# Altium PCB ABC2.PcbDoc (part 1 of 2)
Units mil, origin at the board's own origin, x right, y up, seen from the top; angles counter-clockwise.
Board outline 3540 x 3620 mil, 2 copper layers (Top Layer, Bottom Layer); 54 components, 102 nets, 450 pads, 156 vias.
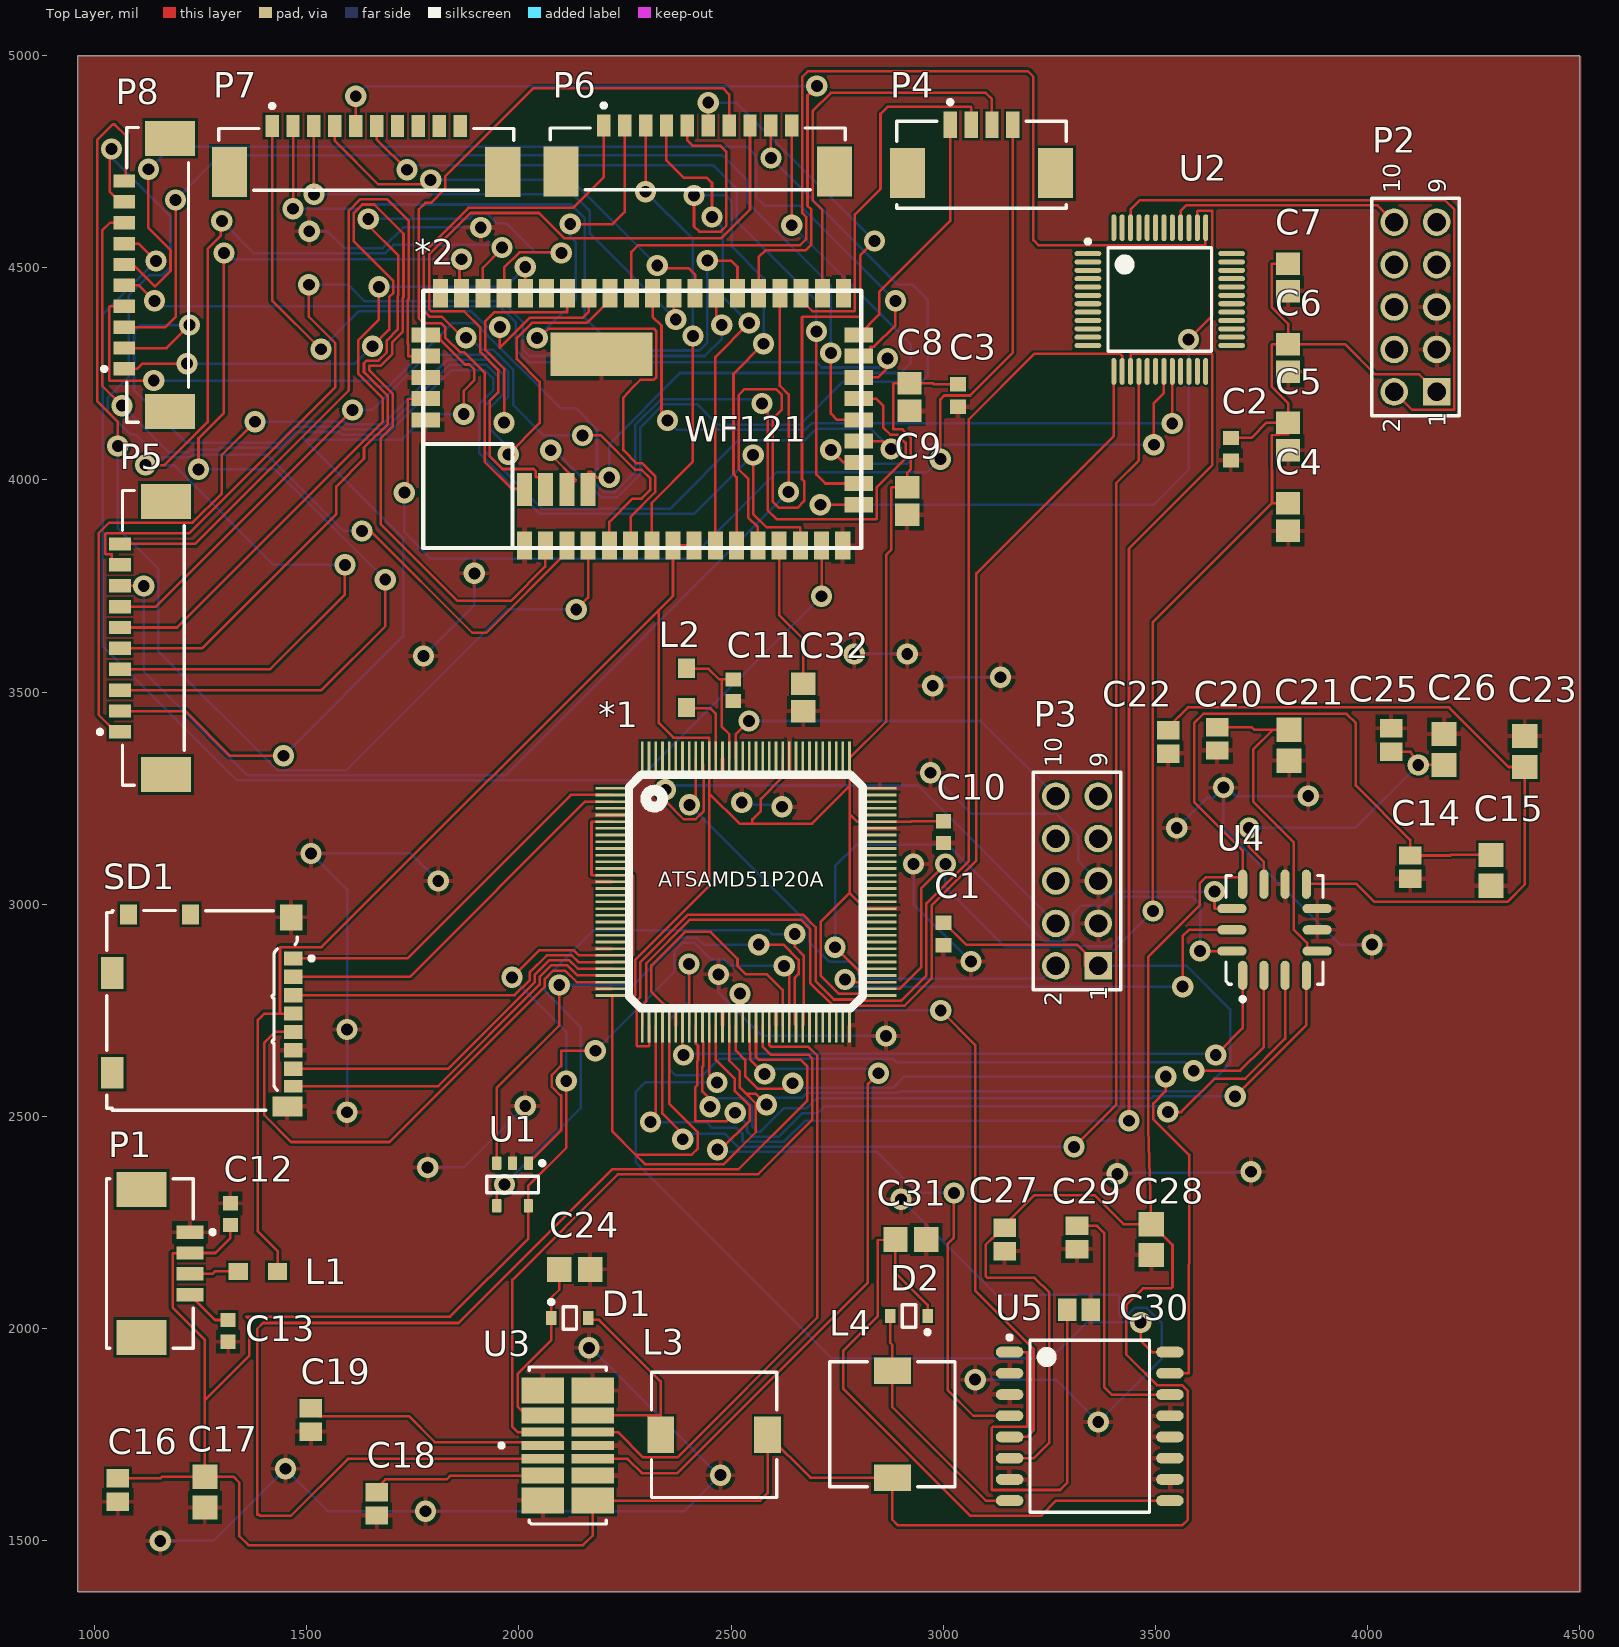
[diagram p0: Top Layer view]
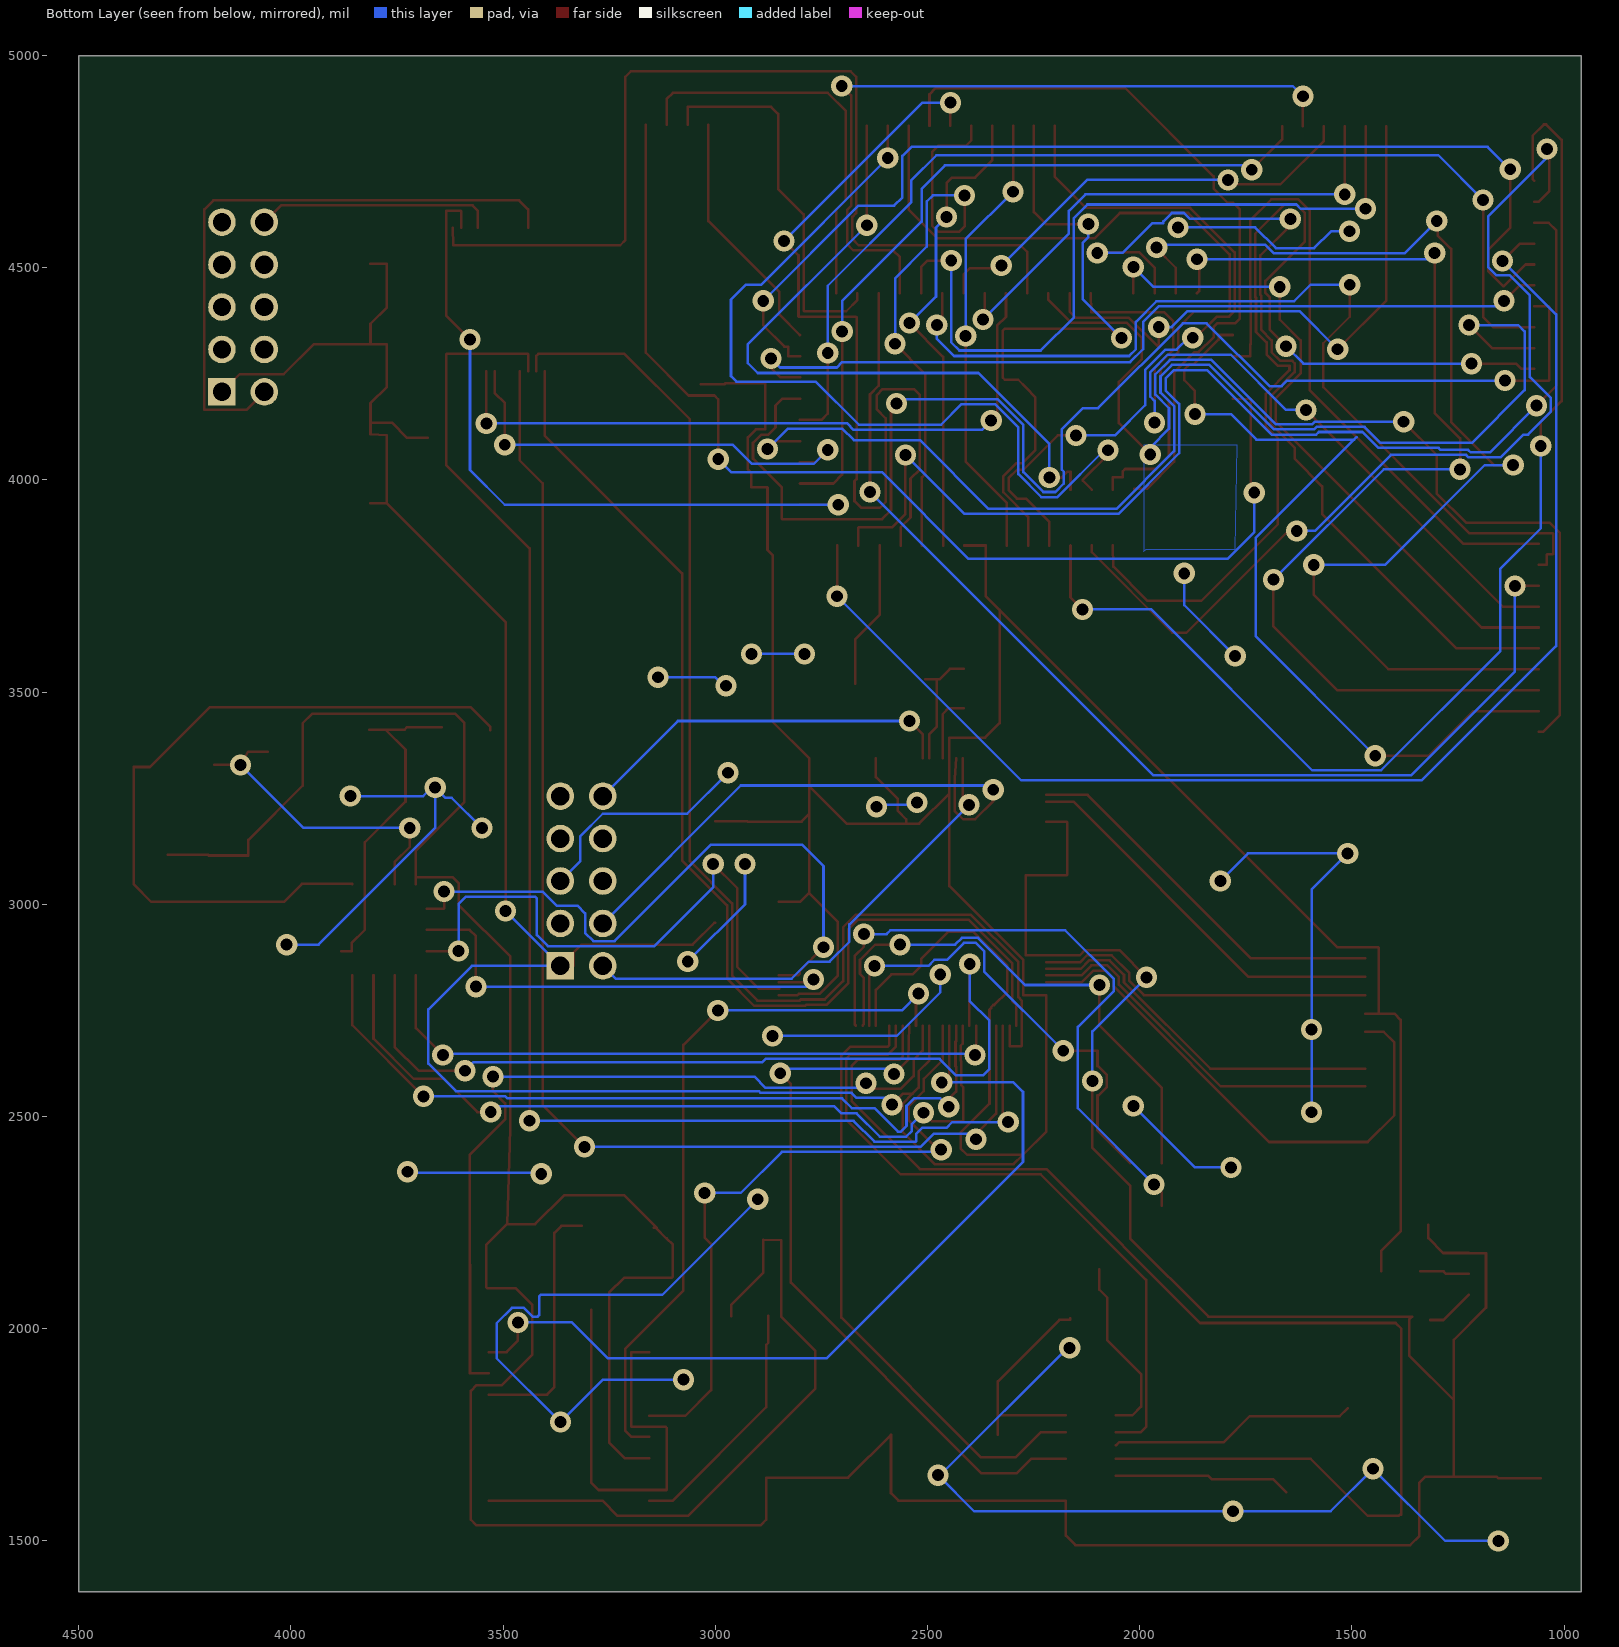
[diagram p1: Bottom Layer view, seen from below]

## Layer stack, top to bottom
Top Solder: solder mask 0.4, Solder Resist, Dk 3.5
Top Layer: signal copper 1.4
Dielectric 1: dielectric 12.6, FR-4, Dk 4.8
Bottom Layer: signal copper 1.4
Bottom Solder: solder mask 0.4, Solder Resist, Dk 3.5

## Board outline
960,1380 4500,1380 4500,5000 960,5000

## Design rules (kind name [scope] priority, off if disabled: settings)
Clearance [All] p1: gap=6 ignorepadtopadclearanceinfootprint=FALSE except(0: Arc-Hole Track-Hole SMDPad-Hole THPad-Hole Via-Hole Fill-Hole Poly-Hole Region-Hole Text-Hole)
MatchedLengths MatchedLengths_6 [InNetClass('SD_51')] p1: tolerance=1 checknetsindiffpair=FALSE checkdiffpairvsdiffpair=TRUE checkxsignals=TRUE checkothers=TRUE
MatchedLengths MatchedLengths_5 [InNetClass('WF_21')] p2: tolerance=1 checknetsindiffpair=FALSE checkdiffpairvsdiffpair=TRUE checkxsignals=TRUE checkothers=TRUE
MatchedLengths MatchedLengths_4 [InNetClass('TEMP_51')] p3: tolerance=1 checknetsindiffpair=FALSE checkdiffpairvsdiffpair=TRUE checkxsignals=TRUE checkothers=TRUE
MatchedLengths MatchedLengths_3 [InNetClass('GYS2_51')] p4: tolerance=1 checknetsindiffpair=FALSE checkdiffpairvsdiffpair=TRUE checkxsignals=TRUE checkothers=TRUE
MatchedLengths MatchedLengths_2 [InNetClass('GYS1_51')] p5: tolerance=1 checknetsindiffpair=FALSE checkdiffpairvsdiffpair=TRUE checkxsignals=TRUE checkothers=TRUE
MatchedLengths MatchedLengths_1 [InNetClass('ACC_51')] p6: tolerance=1 checknetsindiffpair=FALSE checkdiffpairvsdiffpair=TRUE checkxsignals=TRUE checkothers=TRUE
MatchedLengths [InNetClass('51_21')] p7: tolerance=1 checknetsindiffpair=FALSE checkdiffpairvsdiffpair=TRUE checkxsignals=TRUE checkothers=TRUE
PolygonConnect [All] p1: connectstyle=Relief reliefconductorwidth=10 reliefentries=4 polygonreliefangle="90 Angle" airgapwidth=10
RoutingVias [All] p1: holewidth=28 width=50 viastyle="Through Hole" minholewidth=28 minwidth=50 maxholewidth=28 maxwidth=50
SolderMaskExpansion [All] p1: expansion=4
Width [All] p1: maxlimit=6 minlimit=6 preferedwidth=6 minimp=50.000000 maximp=50.000000 favimp=50.000000
30 further rules are at their usual default settings.

## Classes and differential pairs
net class WF_21: WFCLK WFCS WFMISO WFMOSI
net class TEMP_51: TEMPCLK TEMPCS TEMPMISO
net class SD_51: SD0 SD1 SD2 SD3 SD4 SDCLK
net class ACC_51: ACCLK ACCS ACINT1 ACMISO ACMOSI ACSDRDY ACSINT2
net class GYS2_51: GYSCLK2 GYSCS2 GYSMISO2 GYSMOSI2
net class GYS1_51: GYSCLK1 GYSCS1 GYSMISO1 GYSMOSI1
net class Power: 3.3S 3.3UP 3.3V GND
net class 51_21: SAMCLK SAMCS SAMMISO SAMMOSI

## Components (designator, comment, footprint, x,y, rotation, side; value= is the part's Value field where it differs from the comment)
*1 "ATSAMD51P20A" ATSAMD51P20A 2220,3273.46 r0 top
*2 "WF121" WF121 1774.84,3839.61 r0 top
C1 "10uF" CAPC1608X90X35NL10T15 3000,2930 r90 top
C2 "10uF" CAPC1608X90X35NL10T15 3677.44,4072.44 r90 top
C3 "10uF" CAPC1608X90X35NL10T15 3034.7,4198.84 r90 top
C4 ".1uf" CAPC2013X94X50NL20T25 3812.44,3912.44 r90 top
C5 ".1uf" CAPC2013X94X50NL20T25 3812.44,4102.44 r90 top
C6 ".1uf" CAPC2013X94X50NL20T25 3812.44,4287.44 r90 top
C7 ".1uf" CAPC2013X94X50NL20T25 3812.44,4477.44 r90 top
C8 ".1uf" CAPC2013X94X50NL20T25 2920,4195 r90 top
C9 ".1uf" CAPC2013X94X50NL20T25 2915,3950 r90 top
C10 "1uF" CAPC1608X90X35LL15T15 3000,3170 r90 top
C11 "(16V 0.1uF)" CAPC1608X90X35LL15T15 2505,3504.41 r270 top
C12 "1uF" CAPC1608X90X35LL15T15 1320,2270 r90 top
C13 "1uF" CAPC1608X90X35LL15T15 1315,1995 r270 top
C14 "C0805C105K3RACTU" CAPC2013X140X50LL20T25 4100,3087.56 r90 top
C15 "CC0805KRX7R9BB104" CAPC2013X95X50ML10T25 4290,3080 r90 top
C16 "C0805C105K3RACTU" CAPC2013X140X50LL20T25 1055,1620 r270 top
C17 "CC0805KRX7R9BB104" CAPC2013X95X50ML10T25 1260,1615 r270 top
C18 "C0805C105K3RACTU" CAPC2013X140X50LL20T25 1665,1587.56 r270 top
C19 "C0805C105K3RACTU" CAPC2013X140X50LL20T25 1510,1785 r270 top
C20 "C0805C105K3RACTU" CAPC2013X140X50LL20T25 3645,3390 r270 top
C21 "CC0805KRX7R9BB104" CAPC2013X95X50ML10T25 3815,3375 r270 top
C22 "C0805C105K3RACTU" CAPC2013X140X50LL20T25 3530,3382.83 r270 top
C23 "CC0805KRX7R9BB104" CAPC2013X95X50ML10T25 4370,3360 r90 top
C24 "CC0805KRX7R9BB104" CAPC2013X95X50ML10T25 2131.42,2140 r0 top
C25 "C0805C105K3RACTU" CAPC2013X140X50LL20T25 4055,3387.44 r90 top
C26 "CC0805KRX7R9BB104" CAPC2013X95X50ML10T25 4180,3365 r90 top
C27 "C0805C105K3RACTU" CAPC2013X140X50LL20T25 3145,2210 r270 top
C28 "CC0805KRX7R9BB104" CAPC2013X95X50ML10T25 3490,2210 r270 top
C29 "C0805C105K3RACTU" CAPC2013X140X50LL20T25 3315,2215 r270 top
C30 "C0805C105K3RACTU" CAPC2013X140X50LL20T25 3320,2045 r0 top
C31 "CC0805KRX7R9BB104" CAPC2013X95X50ML10T25 2923.58,2210 r0 top
C32 ".1uf" CAPC2013X94X50NL20T25 2670,3487.52 r90 top
D1 "BAT54HT1G" ONSC-SOD-323-2-477-02_V 2120,2025 r0 top
D2 "BAT54HT1G" ONSC-SOD-323-2-477-02_V 2918.9,2030 r180 top
L1 "742792023" SMD-0805 1385,2135 r0 top
L2 "742792023" SMD-0805 2395,3510 r90 top
L3 "74477725" WE-PD-M 2460,1750 r0 top
L4 "74477725" WE-PD-M 2880,1775 r270 top
P1 "53261-0471" MOLEX-53261-0471_V 1167.91,2153.82 r270 top
P2 "61301021121" 61301021121 4112.44,4407.44 r90 top
P3 "61301021121" 61301021121 3315,3055 r90 top
P4 "53261-0471" MOLEX-53261-0471_V 3090,4780 r0 top
P5 "53398-1071" MOLX-53398-1071_V 1128.9,3627.76 r270 top
P6 "53398-1071" MOLX-53398-1071_V 2421.46,4766.1 r180 top
P7 "53398-1071" MOLX-53398-1071_V 1640,4765 r180 top
P8 "53398-1071" MOLX-53398-1071_V 1138.9,4483.03 r270 top
SD1 "104031-0811" MOLX-104031-0811_V 1255,2750 r90 top
U1 "LM95071CIMF/NOPB" DBV0005A_L 1985,2340 r270 top
U2 "ATSAMD21G18A-AU" ATML-TQFP48_M 3510,4425 r0 top
U3 "ADXRS450V" LCC127P900X400X915-14N 2115,1725 r90 top
U4 "ADXL357" LCCS127P605X560X220-14N 3780.39,2940 r90 top
U5 "ADXRS450" SOIC127P1040X373-16N 3345,1770 r0 top

## Footprints (in the part's own frame and the unit in brackets; to place one, negate y for a bottom-side part, rotate by r counter-clockwise, add the part's x,y. Pads: shape width x height; smd on the part's side, far side on the other; paste and mask are expansions set on the pad)
61301021121 [mm] "Pin Header, pitch 2.54 mm, THT, Vertical, dual row, 10p"
  rect 1.65x1.65 hole 1.1: 1(-5.08,-1.27)
  round 1.65 hole 1.1: 2(-5.08,1.27) 3(-2.54,-1.27) 4(-2.54,1.27) 5(0,-1.27) 6(0,1.27) 7(2.54,-1.27) 8(2.54,1.27) 9(5.08,-1.27) 10(5.08,1.27)
  silkscreen extent -6.5,-2.61 6.5,2.61, body extent -6.35,-2.54 6.35,2.54, height 8.59
ATML-TQFP48_M [mm] "QFP, 48-Leads, Body 7x7mm, Pitch 0.5mm, IPC Low Density"
  oval 1.6x0.3 smd: 1(-4.3,2.75) 2(-4.3,2.25) 3(-4.3,1.75) 4(-4.3,1.25) 5(-4.3,0.75) 6(-4.3,0.25) 7(-4.3,-0.25) 8(-4.3,-0.75) 9(-4.3,-1.25) 10(-4.3,-1.75) 11(-4.3,-2.25) 12(-4.3,-2.75) 25(4.3,-2.75) 26(4.3,-2.25) 27(4.3,-1.75) 28(4.3,-1.25) 29(4.3,-0.75) 30(4.3,-0.25) 31(4.3,0.25) 32(4.3,0.75) 33(4.3,1.25) 34(4.3,1.75) 35(4.3,2.25) 36(4.3,2.75)
  oval 0.3x1.6 smd: 13(-2.75,-4.3) 14(-2.25,-4.3) 15(-1.75,-4.3) 16(-1.25,-4.3) 17(-0.75,-4.3) 18(-0.25,-4.3) 19(0.25,-4.3) 20(0.75,-4.3) 21(1.25,-4.3) 22(1.75,-4.3) 23(2.25,-4.3) 24(2.75,-4.3) 37(2.75,4.3) 38(2.25,4.3) 39(1.75,4.3) 40(1.25,4.3) 41(0.75,4.3) 42(0.25,4.3) 43(-0.25,4.3) 44(-0.75,4.3) 45(-1.25,4.3) 46(-1.75,4.3) 47(-2.25,4.3) 48(-2.75,4.3)
  silkscreen extent -4.42,-3.1 3.1,3.6, body extent -4.5,-4.5 4.5,4.5, height 1.2
ATSAMD51P20A [mm]
  rect 2x0.16 smd: 1(0,0) 2(0,-0.4) 3(0,-0.8) 4(0,-1.2) 5(0,-1.6) 6(0,-2) 7(0,-2.4) 8(0,-2.8) 9(0,-3.2) 10(0,-3.6) 11(0,-4) 12(0,-4.4) 13(0,-4.8) 14(0,-5.2) 15(0,-5.6) 16(0,-6) 17(0,-6.4) 18(0,-6.8) 19(0,-7.2) 20(0,-7.6) 21(0,-8) 22(0,-8.4) 23(0,-8.8) 24(0,-9.2) 25(0,-9.6) 26(0,-10) 27(0,-10.4) 28(0,-10.8) 29(0,-11.2) 30(0,-11.6) 31(0,-12) 32(0,-12.4) 65(16,-12.4) 66(16,-12) 67(16,-11.6) 68(16,-11.2) 69(16,-10.8) 70(16,-10.4) 71(16,-10) 72(16,-9.6) 73(16,-9.2) 74(16,-8.8) 75(16,-8.4) 76(16,-8) 77(16,-7.6) 78(16,-7.2) 79(16,-6.8) 80(16,-6.4) 81(16,-6) 82(16,-5.6) 83(16,-5.2) 84(16,-4.8) 85(16,-4.4) 86(16,-4) 87(16,-3.6) 88(16,-3.2) 89(16,-2.8) 90(16,-2.4) 91(16,-2) 92(16,-1.6) 93(16,-1.2) 94(16,-0.8) 95(16,-0.4) 96(16,0)
  rect 0.16x2 smd: 33(1.8,-14.2) 34(2.2,-14.2) 35(2.6,-14.2) 36(3,-14.2) 37(3.4,-14.2) 38(3.8,-14.2) 39(4.2,-14.2) 40(4.6,-14.2) 41(5,-14.2) 42(5.4,-14.2) 43(5.8,-14.2) 44(6.2,-14.2) 45(6.6,-14.2) 46(7,-14.2) 47(7.4,-14.2) 48(7.8,-14.2) 49(8.2,-14.2) 50(8.6,-14.2) 51(9,-14.2) 52(9.4,-14.2) 53(9.8,-14.2) 54(10.2,-14.2) 55(10.6,-14.2) 56(11,-14.2) 57(11.4,-14.2) 58(11.8,-14.2) 59(12.2,-14.2) 60(12.6,-14.2) 61(13,-14.2) 62(13.4,-14.2) 63(13.8,-14.2) 64(14.2,-14.2) 97(14.2,1.8) 98(13.8,1.8) 99(13.4,1.8) 100(13,1.8) 101(12.6,1.8) 102(12.2,1.8) 103(11.8,1.8) 104(11.4,1.8) 105(11,1.8) 106(10.6,1.8) 107(10.2,1.8) 108(9.8,1.8) 109(9.4,1.8) 110(9,1.8) 111(8.6,1.8) 112(8.2,1.8) 113(7.8,1.8) 114(7.4,1.8) 115(7,1.8) 116(6.6,1.8) 117(6.2,1.8) 118(5.8,1.8) 119(5.4,1.8) 120(5,1.8) 121(4.6,1.8) 122(4.2,1.8) 123(3.8,1.8) 124(3.4,1.8) 125(3,1.8) 126(2.6,1.8) 127(2.2,1.8) 128(1.8,1.8)
  silkscreen extent 1,-13.16 15,0.81
CAPC1608X90X35LL15T15 [mm] "Chip Capacitor, 2-Leads, Body 1.60x0.81mm, IPC High Density"
  rect 0.85x0.9 smd: 1(-0.65,0) 2(0.65,0)
  body extent -0.88,-0.48 0.87,0.48, height 0.9
CAPC1608X90X35NL10T15 [mm] "Chip Capacitor, 2-Leads, Body 1.60x0.80mm, IPC Medium Density"
  rect 0.85x0.95 smd: 1(-0.675,0) 2(0.675,0)
  body extent -0.85,-0.45 0.85,0.45, height 0.9
CAPC2013X94X50NL20T25 [mm] "Chip Capacitor, 2-Leads, Body 2.01x1.25mm, IPC Medium Density"
  rect 1.35x1.45 smd: 1(-0.825,0) 2(0.825,0)
  body extent -1.1,-0.72 1.11,0.72, height 0.94
CAPC2013X95X50ML10T25 [mm] "Chip Capacitor, 2-Leads, Body 2.10x1.35mm, IPC Low Density"
  rect 1.45x1.5 smd: 1(-0.925,0) 2(0.925,0)
  body extent -1.05,-0.67 1.05,0.67, height 0.95
CAPC2013X140X50LL20T25 [mm] "Chip Capacitor, 2-Leads, Body 2.00x1.25mm, IPC High Density"
  rect 1.1x1.35 smd: 1(-0.7,0) 2(0.7,0)
  body extent -1.1,-0.72 1.1,0.72, height 1.4
DBV0005A_L [mm] "SOT23, 5-Leads, Body 3.05x1.75mm, Pitch 0.95mm, IPC High Density"
  rrect18% 0.8x0.55 smd: 1(-1.275,0.95) 2(-1.275,0) 3(-1.275,-0.95) 4(1.275,-0.95) 5(1.275,0.95)
  silkscreen extent -1.4,-1.55 0.5,1.9, body extent -1.42,-1.46 1.42,1.46, height 1.08
LCC127P900X400X915-14N [mm] "LCC, 14-Pins, Body 9.00x4.00mmx9.15mm, Pitch 1.27mm, IPC Medium Density"
  rect 1.55x2.55 smd: 1(-3.3,1.5) 7(3.3,1.5) 8(3.3,-1.5) 14(-3.3,-1.5)
  rect 0.95x2.55 smd: 2(-1.8,1.5) 6(1.8,1.5) 9(1.8,-1.5) 13(-1.8,-1.5)
  rect 0.55x2.55 smd: 3(-0.8,1.5) 4(0,1.5) 5(0.8,1.5) 10(0.8,-1.5) 11(0,-1.5) 12(-0.8,-1.5)
  silkscreen extent -4.7,-2.3 4.7,4.09, body extent -4.5,-2 4.5,2, height 9.15
LCCS127P605X560X220-14N [mm] "LCC, 14-Pins, Body 6.05x5.60mmx2.20mm, Pitch 1.27mm, IPC Medium Density"
  oval 1.75x0.55 smd: 1(-2.725,1.905) 2(-2.725,0.635) 3(-2.725,-0.635) 4(-2.725,-1.905) 8(2.725,-1.905) 9(2.725,-0.635) 10(2.725,0.635) 11(2.725,1.905)
  oval 0.55x1.75 smd: 5(-1.27,-2.55) 6(0,-2.55) 7(1.27,-2.55) 12(1.27,2.55) 13(0,2.55) 14(-1.27,2.55)
  silkscreen extent -4.27,-2.9 3.25,2.9, body extent -3.13,-2.8 3.13,2.8, height 2.2
MOLEX-53261-0471_V [mm] "SMD, 4-Leads, Body 10.15x5.2mm, Pitch 1.25mm"
  rect 0.8x1.6 smd: 1(-1.875,1.45) 2(-0.625,1.45) 3(0.625,1.45) 4(1.875,1.45)
  rect 2.1x3 smd: MP1(-4.425,-1.45) MP2(4.425,-1.45)
  silkscreen extent -5.07,-3.55 5.07,2.93, body extent -5.08,-3.55 5.07,1.65, height 3.4
MOLX-53398-1071_V [mm] "SMD, 10-Leads, Body 17.65x3.7mm, Pitch 1.25mm"
  rect 0.8x1.3 smd: 1(5.625,-1.75) 2(4.375,-1.75) 3(3.125,-1.75) 4(1.875,-1.75) 5(0.625,-1.75) 6(-0.625,-1.75) 7(-1.875,-1.75) 8(-3.125,-1.75) 9(-4.375,-1.75) 10(-5.625,-1.75)
  rect 2.1x3 smd: MP1(8.175,1) MP2(-8.175,1)
  silkscreen extent -8.82,-3.07 8.82,2.1, body extent -8.82,-2.1 8.83,2.1, height 4.77
MOLX-104031-0811_V [mm] "Micro SD, 8-Leads, Body 11.95x11.4mm, Pitch 1.1mm"
  rect 0.85x1.1 smd: 1(3.113,-5.412) 2(2.012,-5.412) 3(0.913,-5.412) 4(-0.188,-5.412) 5(-1.287,-5.412) 6(-2.387,-5.412) 7(-3.488,-5.412)
  rect 0.75x1.1 smd: 8(-4.538,-5.412)
  rect 1.2x1 smd: 9(5.748,0.738) 10(5.748,4.437)
  rect 1.55x1.35 smd: 11(5.573,-5.288)
  rect 1.17x1.8 smd: 12(-5.748,-5.063)
  rect 1.9x1.35 smd: 13(-3.723,5.412) 14(2.247,5.412)
  silkscreen extent -5.97,-6.64 5.98,5.74, body extent -5.97,-5.66 5.98,5.74, height 1.45
ONSC-SOD-323-2-477-02_V [mm] "SOD, 2-Leads, Body 1.7x1.25mm"
  rect 0.63x0.83 smd: 1(-1.115,0) 2(1.115,0)
  silkscreen extent -1.24,-0.67 0.4,1.09, body extent -0.85,-0.63 0.85,0.63, height 1.06
SMD-0805 [mm] "Chip Inductor, 2-Leads, Body 2.0x1.2mm"
  rect 1.15x1 smd: 1(-1.175,0) 2(1.175,0)
  body extent -1,-0.6 1,0.6, height 0.89
SOIC127P1040X373-16N [mm] "SOIC, 16-Leads, Body 10.30x7.80mm, Pitch 1.27mm, IPC Medium Density"
  oval 1.65x0.65 smd: 1(-4.8,4.445) 2(-4.8,3.175) 3(-4.8,1.905) 4(-4.8,0.635) 5(-4.8,-0.635) 6(-4.8,-1.905) 7(-4.8,-3.175) 8(-4.8,-4.445) 9(4.8,-4.445) 10(4.8,-3.175) 11(4.8,-1.905) 12(4.8,-0.635) 13(4.8,0.635) 14(4.8,1.905) 15(4.8,3.175) 16(4.8,4.445)
  silkscreen extent -4.92,-5.15 3.57,5.44, body extent -5.21,-5.15 5.21,5.15, height 3.73
WE-PD-M [mm] "SMD Inductor, 2-Leads, Body 7.3 x 7.3 mm"
  rect 1.6x2.2 smd: 1(-3.2,0) 2(3.2,0)
  silkscreen extent -3.75,-3.75 3.75,3.75, body extent -3.65,-3.7 3.65,3.6, height 4.49
WF121 [mm]
  rect 0.9x1.7 smd: 1(6.05,0.15) 2(7.32,0.15) 3(8.59,0.15) 4(9.86,0.15) 5(11.13,0.15) 6(12.4,0.15) 7(13.67,0.15) 8(14.94,0.15) 9(16.21,0.15) 10(17.48,0.15) 11(18.75,0.15) 12(20.02,0.15) 13(21.29,0.15) 14(22.56,0.15) 15(23.83,0.15) 16(25.1,0.15) 26(25.15,15.25) 27(23.88,15.25) 28(22.61,15.25) 29(21.34,15.25) 30(20.07,15.25) 31(18.8,15.25) 32(17.53,15.25) 33(16.26,15.25) 34(14.99,15.25) 35(13.72,15.25) 36(12.45,15.25) 37(11.18,15.25) 38(9.91,15.25) 39(8.64,15.25) 40(7.37,15.25) 41(6.1,15.25) 42(4.83,15.25) 43(3.56,15.25) 44(2.29,15.25) 45(1.02,15.25)
  rect 1.7x0.9 smd: 17(26.05,2.59) 18(26.05,3.86) 19(26.05,5.13) 20(26.05,6.4) 21(26.05,7.67) 22(26.05,8.94) 23(26.05,10.21) 24(26.05,11.48) 25(26.05,12.75) 46(0.15,12.75) 47(0.15,11.48) 48(0.15,10.21) 49(0.15,8.94) 50(0.15,7.67)
  rect 6.1x2.6 smd: 51(10.65,11.6)
  rect 0.9x2 smd: 52(6.05,3.5) 53(7.32,3.5) 54(8.59,3.5) 55(9.86,3.5)
  silkscreen extent 0,0 26.2,15.4

## Part data
*1: "https://www.microchip.com/wwwproducts/en/ATSAMD51P20A#additional-features", ComponentLink1Description=ATSAMD51P20A, ComponentLink1URL=https://www.microchip.com/wwwproducts/en/ATSAMD51P20A#additional-features
*2: "WF121 WIFI Module.", ComponentLink1Description=Datasheet, ComponentLink1URL=https://www.silabs.com/documents/public/data-sheets/WF121-DataSheet.pdf
C1 C2 C3: library part CMP-2006-02792-1, Manufacturer=Murata, Part Number=GRM188R60J106ME47D
C4 C5 C6 C7 C8 C9 C32: library part CMP-2007-04454-1, Manufacturer="AVX Interconnect / Elco", Part Number=0805YC104KAT2A
C10 C12 C13: library part CMP-2006-04551-1, Manufacturer="AVX Interconnect / Elco", Part Number=0603ZC105KAT2A
C11: library part CMP-2006-02126-1, Manufacturer="AVX Interconnect / Elco", Part Number=0603YC104MAT4A
C14 C16 C18 C19 C20 C22 C25 C27 C29 C30: library part CMP-2007-03234-1, Capacitance=1uF, Manufacturer=Kemet, Voltage Rating=25V, Part Number=C0805C105K3RACTU
C15 C17 C21 C23 C24 C26 C28 C31: library part CMP-2100-03606-1, "Chip Capacitor, 100 nF, +/- 10%, 50 V, -55 to 125 degC, 0805 (2012 Metric), RoHS, Tape and Reel", Capacitance=0.1uF, Case/Package=0805, Case Code (Metric)=2012, Dielectric=X7R, Insulation Resistance=100GR, Manufacturer=Yageo, Max Operating Temperature=125degC, Min Operating Temperature=-55degC, Package Description="2-Pin Surface Mount Device, Body 2 x 1.25 mm", Package Quantity=1, Tolerance=10%, Voltage=50V, Case Code (Imperial)=0805, Datasheet URL=http://www.yageo.com/documents/recent/UPY-GPHC_X7R_6.3V-to-50V_15.pdf, Datasheet Version="Rev. 15, 10/2016", Depth=1.25mm, Height=0.85mm, Lead Free=LeadFree, Length=2mm, Manufacturer URL=http://www.yageo.com/, Material=Ceramic, Mount=SurfaceMount, Number of Pins=2, Package Reference=0805, Packaging=TapeandReel, Radiation Hardening=No, REACH SVHC=NoSVHC, RoHSCompliant=True, Termination=SMD/SMT, Thickness=0.033inch, Voltage Rating=50V, Width=0.049inch
D1 D2: library part CMP-1055-00462-1, "Schottky Barrier Diode, 2-Pin SOD-323, Pb-Free, Tape and Reel", Manufacturer="On Semiconductor", ComponentLink1Description="Manufacturer URL", ComponentLink1URL=http://www.onsemi.com/, ComponentLink2Description=Datasheet, ComponentLink2URL=http://www.onsemi.cn/pub_link/Collateral/BAT54HT1-D.PDF, ComponentLink3Description="Package Specification", ComponentLink3URL=http://www.onsemi.com/pub_link/Collateral/477-02.PDF.1, Configuration=Single, DatasheetVersion="Rev. 6", IFSM Max (A)=0.6, Mounting Technology="Surface Mount", PackageDescription="2-Pin SOD, Body 1.7 x 1.25 mm", PackageReference=SOD-323-2-477-02, PackageVersion="Rev. H, 03/2007", Packing="Tape and Reel", PartNumber=BAT54HT1G, RoHS=TRUE, trr Max (ns)=5
L1 L2: library part CMP-0220-00030-1, "SMD EMI Suppression Ferrite Bead WE-CBF, Z = 120 Ohm", ComponentLink1Description="Manufacturer Link", ComponentLink1URL=http://www.we-online.com, ComponentLink2Description=Datasheet, ComponentLink2URL=http://www.we-online.de/katalog/media/pdf/742792023.pdf, DatasheetVersion=Dec-2005, Impedance="120 Ohm", PackageDescription="Chip Inductor, 2-Leads, Body 2.0 x 1.2 mm", PackageReference=SMD-0805, PackageVersion=2005
L3 L4: library part CMP-0227-00119-1, "SMD-Shielded Power Inductor WE-PD, L = 560 µH", Inductance="560 µH", ComponentLink1Description="Manufacturer Link", ComponentLink1URL=http://www.we-online.com, ComponentLink2Description=Datasheet, ComponentLink2URL=http://www.we-online.de/katalog/media/pdf/74477725.pdf, DatasheetVersion="ver 2, Oct-2004", PackageDescription="SMD Inductor, 2-Leads, Body 7.3 x 7.3 mm", PackageReference=WE-PD-M, PackageVersion=2006
P1 P4: library part CMP-2000-05238-1, "Male Header, Pitch 1.25 mm, 1 x 4 Position, Height 3.4 mm, -40 to 85 degC, RoHS, Tape and Reel", Current rating=1A, Manufacturer=Molex, Package Description="1.25mm Pitch PicoBlade(TM) Header, Surface Mount, Right Angle, Lead-Free, 4 Circuits", Voltage Rating=125V, =0532610471, Brand=Molex, Contact material=PhosphorBronze, Contact Plating=Tin, Datasheet URL=http://www.molex.com/pdm_docs/sd/532610471_sd.pdf, Datasheet Version="Rev. G, 01/2012", Factory Pack Quantity=1000, Housing material=Thermoplastic, Manufacturer URL=http://www.molex.com/, Mounting Angle=Right, Mounting Style=SMD/SMT, Number of Positions=4, Number of Positions / Contacts=4, Number of Rows=1, Packaging=Reel, Pitch=1.25mm, Product Category=Headers&WireHousings, Product Type=Headers, RoHS=Details, Series=53261, Termination Style=SMD, Tradename=PicoBlade, Type=Shrouded
P2 P3: library part CMP-1502-01084-1, "THT Vertical Pin Header WR-PHD, Pitch 2.54 mm, Dual Row, 10 pins", Contact Resistance=20mOhm, Manufacturer="Wurth Elektronik", Operating Temperature=-40to105degC, Rated Current=3A, Withstanding Voltage=500VAC, Working Voltage=250VAC, Datasheet URL=https://katalog.we-online.de/em/datasheet/6130xx21121.pdf, Gender=Male, Manufacturer URL=http://www.we-online.de, Mounting Technology=THT, Orientation=Vertical, Package Reference=61301021121, Packaging=Bag, Part Number=61301021121, Pin Number=10, Pitch=2.54mm, Publisher=WurthElektronik, Row Number=Dual
P5 P6 P7 P8: library part CMP-2000-05635-1, "Male Header, Pitch 1.25 mm, 1 x 10 Position, Height 4.7 mm, -40 to 85 degC, RoHS, Tape and Reel", Current rating=1A, Manufacturer=Molex, Package Description="Male Header, Pitch 1.25 mm, 1 x 10 Position, Height 4.7 mm", Voltage Rating=125V, =0533981071, Brand=Molex, Contact Gender=Pin(Male), Contact material=PhosphorBronze, Contact Plating=Tin, Datasheet URL=http://www.molex.com/pdm_docs/sd/533981071_sd.pdf, Datasheet Version="Rev. J, 09/2015", Factory Pack Quantity=1000, Housing material=Nylon, Manufacturer URL=http://www.molex.com/, Mounting Angle=Vertical, Mounting Style=SMD, Mounting Technology=SurfaceMount, Number of Positions=10Position, Number of Rows=1Row, Package Reference=53398-1071, Packaging=Reel, Pitch=1.25mm, Product=Headers, Product Category=Headers&WireHousings, RoHS=Details, Series=53398, Termination Style=SMD, Tradename=PicoBlade, Type=Shrouded
SD1: library part CMP-2000-05825-1, "Micro SD Card, RA, -25 to 85 degC, 8-Pin SMD, RoHS, Tape and Reel", Current rating=500mA, Manufacturer=Molex, Package Description="8-Pin Surface Mount Device, Body 11.95 x 11.4 mm, Pitch 1.1 mm", Voltage Rating=10VAC/DC, Brand=Molex, Card Type=microSD, Contact material=PhosphorBronze, Contact Plating=Gold, Datasheet URL=http://www.molex.com/pdm_docs/sd/1040310811_sd.pdf, Datasheet Version="Rev. E, 04/2006", Height=1.42mm, Housing material=LiquidCrystalPolymer(LCP), Insertion - Extraction Style=Push-Pull, Length=11.4mm, Manufacturer URL=http://www.molex.com/, Mating Cycles=10000, Mounting Technology=SurfaceMount, Mounting Type=Standard, Number of Contacts=8, Number of Rows=1Row, Orientation=RightAngle, Package Reference=104031-0811, Packaging=Reel, Pitch=1.1mm, Product=CardConnectors, Product Category=MemoryCardConnectors, RoHS=True, Series=104031, Termination Style=SMD
U1: library part CMP-0066-00211-3, "SPI/MICROWIRE 13-Bit Plus Sign Temperature Sensor, 5-pin SOT-23, Pb-Free", Manufacturer="Texas Instruments", PackageTopMarking=T18C*XTT, PowerWise=Y, ComponentLink1Description="Datasheet URL", ComponentLink1URL=http://www.ti.com/general/docs/lit/getliterature.tsp?genericPartNumber=LM95071&fileType=pdf, CompType="Temp Sensor IC", PackageDescription="Molded SOT-23, .115 x .063 x .040 in Body, 5 Lead, .0375 in Pitch", PackageReference=DBV0005A, PinCount=5, RoHS=Y
U2: library part CMP-2100-03585-1, "SMART ARM-Based Microcontroller, 1.62 to 3.63 V, 256 KB Flash, 32 KB SRAM, -40 to 85 degC, 48-Pin TQFP, RoHS, Tray", Case/Package=TQFP, Frequency=48MHz, Manufacturer=Atmel, Max Operating Temperature=85degC, Max Supply Voltage=3.63V, Min Operating Temperature=-40degC, Min Supply Voltage=1.62V, Package Description="48-Pin Thin Profile Plastic Quad Flat Package, Body 7 x 7 mm, Pitch 0.5 mm", Package Reference=TQFP48, Contact Plating=Tin, Datasheet URL=http://www.atmel.com/images/atmel-42181-sam-d21_datasheet.pdf, Datasheet Version="Rev. N, 10/2016", Lead Free=LeadFree, Manufacturer URL=http://www.atmel.com/, Max Frequency=48MHz, Mount=SurfaceMount, Number of Pins=48, Number of Timers/Counters=6, Packaging=Tray, REACH SVHC=NoSVHC, RoHSCompliant=true

## Via types
v1: diameter 50, hole 28, Top Layer to Bottom Layer, 156 vias

## Nets (pads, with @x,y where several pads share a name; then routed paths per layer and width w, separated by ;. In a path a pad name is that pad's centre, name@x,y a point inside that pad or via, vN(x,y) a via of type N, cw(c..) or ccw(c..) an arc to the next point about the centre after c; other vN are vias at no path point)
3.3S: *1.6 *1.14 *1.26 C12.1 C14.2 C15.2 C16.1 C17.1 C27.1 C28.1 L3.2 L4.2 P1.2 U1.5 U3.14 U4.11 U5.6 | length 10674.3
  Top Layer w6: C16.1 1155,1647.56 1158.86,1651.42 C17.1 ; C12.1 1320,2213.5 1284.93,2178.43 P1.2 1184,2177.43 1184,2049.89 1260,1973.89 1260,1832 ; v1(1984,2828) 2048,2892 2128.97,2892 2141.2,2879.76 *1.26 2268,2879.76 2269,2880.76 2269,3067.74 2268,3068.74 *1.14 2172,3068.74 2171,3069.74 2171,3193.72 2172,3194.72 *1.6 ; v1(2111.5,2584) 2111.5,2426.4 2022.4,2337.3 U1.5 2022.4,2213 1837.9,2028.5 1358,2028.5 1365,2021.5 1365,1937 1260,1832 ; C27.1 C27.1@3140.08,2237.56 ; U5.6 3213.5,1695 3250,1731.5 3250,2085 3215,2120 3103.51,2120 3100,2123.51 3100,2198.4 3114.7,2213.1 3115.61,2213.1 C27.1@3140.08,2237.56 ; U4.11 U4.11@3705.39,3064.26 ; C15.2 4195.3,3116.42 4194,3115.12 C14.2 4100,3152 3972,3280 3972,3427 3950,3449 3612.5,3449 3591,3427.5 3591,3241.39 3705.39,3127 U4.11@3705.39,3064.26 ; C17.1 1260,1832 ; C17.1 1327.08,1651.42 1341,1637.5 1341,1511.5 1362.5,1490 2151.5,1490 2174,1512.5 2174,1595.08 U3.14 2568.56,1595.08 2585.98,1612.5 L3.2 2686.97,1649.02 L4.2 2880,1550 2892.5,1537.5 3563.5,1537.5 3576,1550 3576,1853.5 3562.5,1867 3503,1867 3431,1939 3431,2056 3470,2095 3536.49,2095 3540,2098.51 3540,2197.4 3490.98,2246.42 C28.1 ; C27.1@3140.08,2237.56 3137.56,2237.56 3215,2315 3355.84,2315 3424.42,2246.42 C28.1 ; C28.1 3483,2471.5 3483,2876.91 3604.64,2998.54 3604.64,3050 3618.89,3064.26 U4.11@3705.39,3064.26
  Bottom Layer w6: v1(1984,2828) 2111.5,2700.5 v1(2111.5,2584)
3.3UP: *1.32 *1.37 *1.46 *1.54 *1.65 *1.79 *1.91 *1.97 *1.107 *1.118 *2.8 *2.9 C1.2 C2.2 C3.2 C4.2 C5.2 C6.2 C7.2 C8.2 C9.2 C10.2 L1.2 P2.1 P3.1 SD1.4 | length 12934.7
  Top Layer w6: L1.2 1431.26,2183 1385,2229.26 1385,2727.62 1400,2742.62 1438,2742.62 ; SD1.4 1438,2742.62 ; *2.9 *2.8 2363.03,3727.03 2330,3694 ; *1.46 2495.59,2632 2520.85,2606.74 2520.85,2568.15 2535.19,2553.81 ; v1(2583.45,2527.95) 2557.58,2553.81 2535.19,2553.81 ; *1.54 2621.57,2798.43 2585,2835 2534.92,2835 2515,2854.92 2515,2871.64 2451.64,2935 2391.12,2935 2312,2855.88 2312,2793.78 2343,2762.78 2344.99,2762.78 2350.26,2757.51 2350.26,2755.52 2353.86,2751.92 *1.37 2353.86,2530.5 2421.86,2462.5 2421.86,2425 2406.86,2410 2275,2410 ; *1.107 2621.57,3300 2570,3248.43 2570,3220 2550,3200 2550,3190 ; *1.65 2807,2785.28 2803.28,2789 2754.42,2789 2711,2832.42 2711,2958.64 2779.05,3026.69 ; *1.79 2800,3005.75 2779.05,3026.69 ; C1.2 3002,2956.57 3053.57,2905 3315.5,2905 3333,2887.5 3333,2855 P3.1 ; C10.2 2924.87,3195.59 2924,3194.72 *1.91 2796.83,3194.72 2779.05,3212.5 ; C3.2 2978.06,4225.42 2976,4227.48 C8.2 2883,4227.48 2882,4226.48 2882,4120 2883,4119 2904.15,4119 2923.15,4100 2923.15,4025 2915,4016.85 C9.2 2878,3982.48 2877,3981.48 2877,3835 2865,3823 2865,3430.28 *1.97 2779.05,3278.41 ; v1(3494,2984) 3494,3664.92 3774.5,3945.42 ; C2.2 3726,4099.02 3761.91,4134.92 C5.2 ; C4.2 3774.5,3945.42 ; C7.2 3775,4509.92 3774,4508.92 3774,4406.44 3812.44,4368 C6.2 ; P2.1 4120.89,4249 4017,4249 3946.08,4319.92 C6.2 ; 1438,2742.62 1437,2743.62 1437,2898 1438,2899 1535,2899 2330,3694 ; 2275,2410 2297,2388 2483,2388 2558,2463 2558,2531 2535.19,2553.81 ; 2275,2410 2220,2465 *1.32 2273,2785.28 2274,2786.28 2274,2868.79 2448.35,3043.14 2448.35,3261.65 ; 2330,3694 2330,3427.03 2364.03,3393 2447.35,3393 2448.35,3392 *1.118 2448.35,3261.65 ; 2448.35,3261.65 2520,3190 2550,3190 ; 2550,3190 2690.64,3190 2779.05,3278.41 ; 2779.05,3026.69 2779.05,3212.5 ; 2779.05,3212.5 2779.05,3278.41 ; 3774.5,3945.42 3774,4105 3812.44,4108 C5.2 ; C5.2 3812.44,4181 3774,4219.44 3774,4318.92 3775,4319.92 C6.2
  Bottom Layer w6: v1(2583.45,2527.95) 2600,2544.5 2667.96,2544.5 2679,2555.54 2893.29,2555.54 2897.43,2559.68 3611.18,2559.68 3676,2624.5 3676,2752.58 3573.58,2855 P3.1 v1(3494,2984)
3.3V: C13.1 P1.4 | length 114.6
  Top Layer w6: P1.4 1284.41,2020.59 C13.1
ACCLK: *1.39 U4.1 | length 1541
  Top Layer w6: *1.39 2385.35,2647.65 v1(2388,2645) ; v1(3642,2645) 3705.39,2708.39 U4.1
  Bottom Layer w6: v1(2388,2645) 2391,2648 3639,2648 v1(3642,2645)
ACCS: *1.42 U4.4 | length 1894.8
  Top Layer w6: *1.42 2432.6,2678.04 2434,2676.63 2434,2618.6 2432.5,2617.1 2432.5,2559 2450,2541.5 v1(2450,2523) ; v1(3687.68,2547.68) 3855.39,2715.39 U4.4
  Bottom Layer w6: v1(2450,2523) 2470,2543 2531.45,2543 2549.45,2525 2549.45,2477.73 2562.5,2464.68 2569.63,2464.68 2624.95,2520 2678.5,2520 2701.5,2543 3490.06,2543 3494.74,2547.68 v1(3687.68,2547.68)
ACINT1: *1.68 U4.12 | length 1491.7
  Top Layer w6: v1(2745,2899) 2801,2843 2801,2836 2804.48,2832.52 *1.68 ; v1(3639,3030) 3639,2991 3640,2990 U4.12
  Bottom Layer w6: v1(2745,2899) 2745,3090 2795,3140 3011.02,3140 3237.5,2913.52 3287.5,2913.52 3306.48,2932.5 3306.48,2978.48 3325,2997 3374,2997 3407,3030 v1(3639,3030)
ACMISO: *1.40 U4.2 | length 2038.7
  Top Layer w6: v1(2400.55,2859.45) 2401.1,2858.9 *1.40 ; v1(3590,2608) 3699,2608 3755.39,2664.39 U4.2
  Bottom Layer w6: v1(2400.55,2859.45) 2400.55,2772.55 2354,2726 2354,2612.5 2369.5,2597 2432.5,2597 2471.5,2636 2881.29,2636 2889.29,2628 3570,2628 v1(3590,2608)
ACMOSI: *1.41 U4.3 | length 1915.8
  Top Layer w6: *1.41 2416.85,2672 2422,2666.85 2422,2632.1 2420.5,2630.6 2420.5,2574 2416,2569.5 2416,2490 2417,2489 2489.5,2489 v1(2509.5,2509) ; v1(3529,2510.5) 3560.5,2510.5 3639,2589 3711,2589 3805.39,2683.39 U4.3
  Bottom Layer w6: v1(2509.5,2509) 2537.45,2481.05 2537.45,2465.23 2550,2452.68 2612.5,2452.68 2667.32,2507.5 2703,2507.5 2719.5,2524 3515.5,2524 v1(3529,2510.5)
ACSDRDY: *1.66 U4.14 | length 1389.3
  Top Layer w6: *1.66 2896.68,2801.02 2948.3,2852.64 2948.3,3038.3 v1(3005,3095) ; v1(3605,2890) U4.14
  Bottom Layer w6: v1(3005,3095) 3005,3040 3143.48,2901.52 3394.52,2901.52 3420.25,2927.25 3420.25,3013.25 3425,3018 3587.5,3018 3605,3000.5 v1(3605,2890)
ACSINT2: *1.67 U4.13 | length 1127.8
  Top Layer w6: v1(2768.5,2823) 2774.73,2816.77 *1.67 ; v1(3564,2806) 3564,2925 3579,2940 U4.13
  Bottom Layer w6: v1(2768.5,2823) 2785.5,2806 v1(3564,2806)
GND: *1.5 *1.15 *1.25 *1.31 *1.38 *1.45 *1.53 *1.64 *1.78 *1.90 *1.96 *1.106 *1.116 *2.1 *2.16 *2.26 *2.45 *2.48 *2.50 *2.51 C1.1 C2.1 C3.1 C4.1 C5.1 C6.1 C7.1 C8.1 C9.1 C10.1 C11.2 C12.2 C13.2 C14.1 C15.1 C16.2 C17.2 C18.2 C19.2 C20.2 C21.2 C22.2 C23.2 C24.2 C25.2 C26.2 C27.2 C28.2 C29.2 C30.2 C31.2 C32.1 P1.1 P2.3 P2.5 P3.3 P3.5 SD1.6 SD1.11 SD1.12 U1.2 U3.1 U3.7 U3.8 U3.11 U3.13 U4.6 U4.7 U4.9 U5.2 U5.3 U5.7 U5.10 U5.11 U5.12 U5.13 | length 8175.8
  Bottom Layer w6: v1(1155,1500) 1280,1500 v1(1450,1670) 1550,1570 v1(1780,1570) 2390,1570 v1(2475,1655) 2470,1655 2170,1955 v1(2165,1955) ; v1(1505.9,4585.86) 1549.14,4585.86 1589,4546 1679.08,4546 1728.08,4595 v1(1910,4595) ; v1(1595,2510) v1(1595,2705) 1595,3035 v1(1510,3120) 1745,3120 v1(1810,3055) ; v1(1775,3585) 1895,3705 v1(1895,3780) ; v1(1785,2380) 1870,2380 v1(2015,2525) ; v1(2470,2835) 2470,2792.42 2572.42,2690 v1(2865,2690) ; v1(2525,3240) 2530,3235 2615,3235 v1(2620,3230) ; v1@2805,3590 v1(2915,3590) ; v1(2900,2305) 3125,2080 3411.49,2080 3415,2076.49 3415,2032 3418.51,2028.49 3430.4,2028.49 3450.92,2049 3479.08,2049 3515,2013.08 3515,1930 v1(3365,1780) 3265,1880 v1(3075,1880) ; v1(2930,3095) 2930,3000 v1(3065,2865) ; v1(2970,3310) 3066.48,3213.52 3265.14,3213.52 3317.95,3160.71 3317.95,3102.05 P3.5 ; v1@2970,3505 3000,3535 v1(3135,3535) ; v1(3410,2365) 3412.5,2367.5 3722.5,2367.5 v1(3725,2370) ; v1(3550,3180) 3620.96,3250.96 3635.96,3250.96 v1(3660,3275) ; v1(3860,3255) 3688.08,3255 3668.08,3275 v1(3660,3275) ; v1(4010,2905) 3935,2905 3660,3180 v1(3660,3275)
  other v1: 2975,3515 2790,3590
GYSCLK1: *1.43 U5.16 | length 2047.4
  Top Layer w6: *1.43 2448.35,2598.65 v1(2466.5,2580.5) ; v1(3465,2015) 3465,1971.95 3491.95,1945 U5.16
  Bottom Layer w6: v1(2466.5,2580.5) 2297.5,2580.5 2275,2558 2275,2393 2738,1930 3253,1930 3338,2015 v1(3465,2015)
GYSCLK2: *1.51 U3.5 | length 1608
  Top Layer w6: U3.5 1997,1756.5 1984.75,1768.75 1984.75,2115.25 2233.5,2364 2563.42,2364 2691,2491.58 2691,2637 2682,2646 2593.27,2646 2574.33,2664.94 *1.51
GYSCS1: *1.44 U5.4 | length 1602.5
  Top Layer w6: *1.44 2464.09,2633.21 2508.85,2588.45 2508.85,2560.15 2544,2525 2544,2491 2475,2422 v1(2467.82,2422) ; v1(3025,2320) 3025,2215 3010,2200 3010,1855.5 3070.5,1795 U5.4
  Bottom Layer w6: v1(2467.82,2422) 2473.14,2416.68 2843.32,2416.68 2940,2320 v1(3025,2320)
GYSCS2: *1.52 U3.10 | length 1476.6
  Top Layer w6: U3.10 2233,1756.5 2292.5,1697 2374,1697 2703,2026 2703,2643.48 2681.5,2664.98 2593.56,2664.98 2590.08,2668.46 *1.52
GYSMISO1: *1.48 U5.5 | length 1709.9
  Top Layer w6: v1(2521,2789.5) 2527.09,2783.41 *1.48 ; v1(2994,2750) 3075,2669 3075,2090 3212.51,1952.49 3212.51,1760.51 3197,1745 U5.5
  Bottom Layer w6: v1(2521,2789.5) 2560.5,2750 v1(2994,2750)
GYSMISO2: *1.50 U3.3 | length 2970.3
  Top Layer w6: U3.3 1597,1693.5 1462.85,1559.35 1389.7,1559.35 1387.04,1562 1383.5,1562 1383.5,2000 1397,2013.5 1857.5,2013.5 2220,2376 2518,2376 2679,2537 2679,2619 2664,2634 2565,2634 2558.58,2640.42 *1.50
GYSMOSI1: *1.47 U5.15 | length 1941.9
  Top Layer w6: *1.47 2511.34,2655.21 2532.85,2633.69 2532.85,2595.46 2562.5,2565.81 2632.31,2565.81 v1(2645,2578.5) ; v1(3524,2594) 3524,2560 3495,2531 3495,2493.5 3579,2409.5 3578,1895 U5.15
  Bottom Layer w6: v1(2645,2578.5) 2655.96,2567.54 2881.29,2567.54 2907.75,2594 v1(3524,2594)
GYSMOSI2: *1.49 U3.12 | length 1757.6
  Top Layer w6: U3.12 2256,1693.5 2289.5,1660 2373.5,1660 2822,2108.5 2822,2577 v1(2847,2602) ; *1.49 2544.85,2634.15 v1(2579,2600)
  Bottom Layer w6: v1(2579,2600) 2591.5,2612.5 2836.5,2612.5 v1(2847,2602)
Net*1_115: *1.115 C11.1 L2.2 | length 293.5
  Top Layer w6: 2415,3555 2447,3555 2472,3530 2479,3530 ; *1.115 2495.59,3401 2478.28,3418.31 2478.28,3529.28 2479,3530 ; C11.1 2479,3530
Net*1_117: *1.117 L2.1 | length 159
  Top Layer w6: 2415,3462.48 2450,3462.48 2464.09,3448.39 *1.117
Net*2_2: *2.2 P8.1 | length 2448.1
  Top Layer w6: P8.1 1100.57,4261.57 1113,4274 v1(1218,4274) ; v1(1655,4315) 1694,4354 1694,4430.92 1704,4440.92 1704,4469.08 1611,4562.08 1611,4629.08 1630.92,4649 1659.08,4649 1728,4580.08 1728,4430.98 1726,4428.98 1726,4349.03 1701,4324.03 1701,4295.95 1674.05,4269 1647,4269 1647,4258.86 1703,4202.86 1703,4126.99 1674.73,4098.72 1674.73,3895.27 1855,3715 1981.3,3715 2061.85,3795.55 *2.2
  Bottom Layer w6: v1(1218,4274) 1614,4274 v1(1655,4315)
Net*2_3: *2.3 P8.9 | length 2300
  Top Layer w6: v1(1040,4780) 1035.41,4775.41 1035.41,4680.02 1060.16,4655.28 P8.9 ; v1(1630,3880) 1650,3880 1890,3640 1923.27,3640 2113.03,3829.76 *2.3
  Bottom Layer w6: v1(1040,4780) 1040,4760 1179,4621 1179,4501.77 1159.08,4481.85 1127.97,4481.85 1080.53,4434.41 1080.53,4242.53 1031,4193 1031,4160.92 1084.96,4106.96 1096.12,4106.96 1150.08,4053 1224.92,4053 1230.92,4059 1407.97,4059 1586.97,3880 v1(1630,3880)
Net*2_4: *2.4 P8.10 | length 2886.5
  Top Layer w6: v1(1055,4080) 1055,4136.92 1006,4185.92 1006,4801 1042.51,4837.51 1047.49,4837.51 1074,4811 1074,4708.49 P8.10 ; v1(2135,3695) 2163.03,3723.03 *2.4
  Bottom Layer w6: v1(1055,4080) 1055,3885.96 1150,3790.96 1150,3596.92 1430.92,3316 1593.51,3316 1972.51,3695 v1(2135,3695)
Net*2_5: *2.5 P6.1 | length 1711.8
  Top Layer w6: v1(1875,4335) 1868.2,4335 1818.2,4385 1789.12,4385 1776.28,4397.84 1776.28,4536.34 1880.95,4641 2127,4641 2200,4714 P6.1 ; v1(2150,4105) 2193.08,4105 2274.03,4024.05 2289.03,4024.05 2309,4004.08 2309,3975.92 2289.08,3956 2268.1,3956 2213.03,3900.94 *2.5
  Bottom Layer w6: v1(1875,4335) 1885,4335 1913,4307 1938.97,4307 1987,4258.97 1987,4176.03 2058.03,4105 v1(2150,4105)
Net*2_6: *2.6 P6.2 | length 1565.6
  Top Layer w6: v1(2043,4334.5) 2048.35,4334.5 2070.33,4356.48 2317.94,4356.48 2323.21,4351.21 2323.21,4241.39 2317.94,4236.12 2286.12,4236.12 2268,4218 2246,4194 2246,4070.42 2277.42,4039 2291.05,4039 2321,4009.05 2321,3970.95 2263.03,3912.98 *2.6 ; v1(2121,4603) 2221,4603 2249.21,4631.21 P6.2
  Bottom Layer w6: v1(2043,4334.5) 2134,4425.5 2134,4559.08 2121,4572.08 v1(2121,4603)
Net*2_7: *2.7 P6.3 | length 1075.9
  Top Layer w6: v1(2298.43,4678.93) P6.3 ; *2.7 2313.03,3946.01 2410,4042.98 v1(2410,4339)
  Bottom Layer w6: v1(2298.43,4678.93) 2410,4567.35 v1(2410,4339)
Net*2_10: *2.10 P6.4 | length 1135
  Top Layer w6: P6.4 2347.64,4752.86 2388,4712.5 2442.5,4712.5 2455,4700 v1(2455,4619.5) ; *2.10 2463.03,4290.03 v1(2542.5,4369.5)
  Bottom Layer w6: v1(2455,4619.5) 2480,4594.5 2480,4432 v1(2542.5,4369.5)
Net*2_11: *2.11 P6.5 | length 1442.1
  Top Layer w6: P6.5 2396.85,4800 2409.85,4787 2475,4787 2489,4773 2489,4599 2475,4585 2425,4585 2412.5,4597.5 v1(2412.5,4670.5) ; *2.11 2513.03,4006.24 2505.6,4013.67 2505.6,4250.1 v1(2576.5,4321)
  Bottom Layer w6: v1(2412.5,4670.5) 2487.5,4670.5 2501.78,4656.22 2501.78,4549.82 2576.5,4475.1 v1(2576.5,4321)
Net*2_12: *2.12 P6.6 | length 2178.4
  Top Layer w6: P6.6 v1(2446.06,4889) ; *2.12 2563.03,3888.97 2540,3912 2540,4003 2518,4025 2518,4200 2532,4214 2605.5,4214 2619.5,4200 2619.5,4166.19 2598.31,4145 2598.31,3948.19 2612.5,3934 2656,3934 2672,3950 2672,3997 2667,4002 2667,4383 2669,4385 2803,4385 2804,4386 2804,4529 v1(2838,4563)
  Bottom Layer w6: v1(2446.06,4889) 2512,4889 v1(2838,4563)
Net*2_13: *2.13 C32.2 | length 349.1
  Top Layer w6: *2.13 2613.03,3682 2670,3625.03 C32.2
Net*2_14: *2.14 P8.8 | length 2761.2
  Top Layer w6: v1(1065,4175) 1018,4222 1018,4587.5 1036.56,4606.06 P8.8 ; v1(2552,4059) 2552,3920 2584,3888 2662.03,3888 2663.03,3887 *2.14
  Bottom Layer w6: v1(1065,4175) 1175,4065 1219.95,4065 1225.95,4071 1291,4071 1295.5,4075.5 1437.47,4075.5 1474.97,4113 1577.98,4113 1583.98,4107 1688.92,4107 1840.92,4259 1919.08,4259 1939,4239.08 1939,4210.92 1907,4178.92 1907,4062.95 2049.95,3920 2413,3920 v1(2552,4059)
Net*2_15: *2.15 P8.7 | length 3175.9
  Top Layer w6: P8.7 1104,4556.85 v1(1145,4515.85) ; v1(2713.03,3726) *2.15
  Bottom Layer w6: v1(1145,4515.85) 1019,4389.85 1019,3608.5 1335.5,3292 2279.03,3292 v1(2713.03,3726)
Net*2_18: *2.18 P7.6 | length 1796.3
  Top Layer w6: P7.6 1664.61,4802.39 v1(1736,4731) ; v1(2701,4349.5) 2701,4012.5 2721.92,3991.58 *2.18
  Bottom Layer w6: v1(1736,4731) 1746,4741 2458.78,4741 2513.78,4686 2513.78,4608.44 2701,4421.22 v1(2701,4349.5)
Net*2_20: *2.20 P8.2 | length 2839.9
  Top Layer w6: P8.2 1169.79,4310.79 v1(1224,4365) ; *2.20 2858.42,4091.58 v1(2877,4073)
  Bottom Layer w6: v1(1224,4365) 1108,4365 1093,4350 1093,4211.5 1217,4087.5 1432.5,4087.5 1470,4125 1582.95,4125 1588.95,4119 1683.95,4119 1835.95,4271 1924.05,4271 1951,4244.05 1951,4205.95 1919,4173.95 1919,4067.92 2054.92,3932 2355.93,3932 2517.6,4093.67 2673.58,4093.67 2701,4121.09 2828.91,4121.09 v1(2877,4073)
Net*2_21: *2.21 P8.3 | length 2524.6
  Top Layer w6: P8.3 1167,4360 1191,4384 v1(1191,4659.88) ; v1(2735,4299) 2735,4156.58 2750,4141.58 *2.21
  Bottom Layer w6: v1(1191,4659.88) 1296.12,4765 2479.28,4765 2537.78,4706.5 2537.78,4654.78 2735,4457.56 v1(2735,4299)
Net*2_22: *2.22 P8.4 | length 3133.9
  Top Layer w6: P8.4 1036,4409.21 1035,4408.21 1035,4235 1036,4234 v1(1139.5,4234) ; v1(2573,4180) 2586,4167 2586,3928.54 2607.04,3907.5 2842,3907.5 2843,3908.5 2843,3981.85 2911.15,4050 2911.15,4087.5 2891.65,4107 2875,4107 2858.15,4123.85 2858.15,4175 2841.58,4191.58 *2.22
  Bottom Layer w6: v1(1139.5,4234) 1652.92,4234 1665.92,4221 1694.08,4221 1842.08,4369 1897.92,4369 2097.92,4169 2134.08,4169 2184,4119.08 2184,4024.8 2178.92,4019.72 2178.92,3991.55 2198.84,3971.63 2227,3971.63 2274,4018.63 2274,4129.05 2335.45,4190.5 2562.5,4190.5 v1(2573,4180)
Net*2_23: *2.23 P8.5 | length 2024.2
  Top Layer w6: P8.5 1105,4458.43 v1(1141.43,4422) ; *2.23 2846,4241.58 2868.42,4264 v1(2868.42,4286)
  Bottom Layer w6: v1(1141.43,4422) 1154.43,4409 1955.39,4409 1992.03,4372.37 1992.03,4308 2022.53,4277.5 2701,4277.5 2713.5,4265 2847.42,4265 v1(2868.42,4286)
Net*2_24: *2.24 P8.6 | length 2582.3
  Top Layer w6: P8.6 1091,4507.64 1141.64,4457 1143.64,4457 1179,4492.36 1179,4541.84 1127,4593.84 v1(1127,4732) ; *2.24 2828,4291.58 2828,4313 2829,4314 2837,4314 2887,4364 v1(2887,4422)
  Bottom Layer w6: v1(1127,4732) 1180,4785 2537.5,4785 2559,4763.5 2559,4666 2578.41,4646.59 2662.41,4646.59 v1(2887,4422)
Net*2_25: *2.25 P4.1 | length 585.2
  Top Layer w6: *2.25 2801,4341.58 2848.92,4389.49 2848.92,4442.49 3016.18,4609.75 P4.1
Net*2_27: *2.27 P4.3 | length 945.1
  Top Layer w6: *2.27 2715,4636.27 2692.27,4659 2692.27,4869.27 2735,4912 3100,4912 3114.61,4897.39 P4.3
Net*2_28: *2.28 P4.2 | length 904.3
  Top Layer w6: *2.28 2665,4424 2691.47,4397.53 2790.25,4397.53 2791.72,4399 2791.72,4625.72 2852,4686 2852,4862.5 2868.5,4879 3064.39,4879 3065.39,4878 P4.2
Net*2_29: *2.29 P5.8 | length 2632.1
  Top Layer w6: P5.8 1115.21,3750.79 v1(1116,3750) ; *2.29 2615,4222 2635.5,4201.5 v1(2635.5,3971.5)
  Bottom Layer w6: v1(1116,3750) 1116,3548.5 1360.5,3304 1968,3304 v1(2635.5,3971.5)
Net*2_30: *2.30 P7.5 | length 1773.9
  Top Layer w6: P7.5 v1(1615.39,4904) ; *2.30 2565,4525 2581,4541 2675,4541 2689,4555 2689,4637 2680,4646 2680,4906 v1(2702,4928)
  Bottom Layer w6: v1(1615.39,4904) 1639.39,4928 v1(2702,4928)
Net*2_31: *2.31 P7.2 | length 1794.8
  Top Layer w6: v1(1467.76,4639) P7.2 ; v1(2444,4517) 2500,4517 2515,4502 *2.31
  Bottom Layer w6: v1(1467.76,4639) 1620.92,4639 1630.92,4649 2123.08,4649 2155,4617.08 2155,4383.25 2233.25,4305 2425,4305 2444,4324 v1(2444,4517)
Net*2_32: *2.32 P5.9 | length 2268.5
  Top Layer w6: P5.9 1041,3800 1041,3823.46 1040,3824.46 1026.95,3824.46 1025.41,3826 1025.41,3873 1026.41,3874 1222.75,3874 1567.5,4218.75 1567.5,4322.08 1505,4384.58 v1(1505,4460) ; *2.32 2465,4378 v1(2478,4365)
  Bottom Layer w6: v1(1505,4460) 1596.92,4460 1635.92,4421 1960.36,4421 2009,4372.36 2009,4308 2025,4292 2437.5,4292 2478,4332.5 v1(2478,4365)
Net*2_33: *2.33 P7.4 | length 1066.7
  Top Layer w6: P7.4 1566.18,4799 1668.46,4696.72 1781.72,4696.72 v1(1792,4707) ; v1(2326,4505) 2332,4499 2400,4499 2415,4484 *2.33
  Bottom Layer w6: v1(1792,4707) 2124,4707 v1(2326,4505)
Net*2_34: *2.34 P7.3 | length 1230.8
  Top Layer w6: v1(1516.97,4673) P7.3 ; *2.34 2365,4382.5 v1(2369.5,4378)
  Bottom Layer w6: v1(1516.97,4673) 2127.9,4673 2167,4633.9 2167,4580.5 v1(2369.5,4378)
Net*2_37: *2.37 P5.1 | length 2510.1
  Top Layer w6: P5.1 1050.16,3406.3 1010,3446.46 1010,3874.56 1034.7,3899.27 1231.05,3899.27 1300.32,3968.53 1300.32,4059.32 v1(1378,4137) ; v1(1975,4060) 2049,4134 2049,4231 1995,4285 1995,4334.58 2030.42,4370 2160.75,4370 2215,4424.25 *2.37
  Bottom Layer w6: v1(1378,4137) 1587.92,4137 1593.92,4131 1678.98,4131 1830.98,4283 1929.02,4283 1963,4249.02 1963,4200.98 1931,4168.98 1931,4120.92 1975,4076.92 v1(1975,4060)
Net*2_38: *2.38 P7.1 | length 1384
  Top Layer w6: P7.1 1418.54,4422.96 v1(1533.5,4308) ; v1(1955,4360) 1955,4311.55 2025.45,4382 2150,4382 2165,4397 *2.38
  Bottom Layer w6: v1(1533.5,4308) 1622.5,4397 1888.05,4397 1925.05,4360 v1(1955,4360)
Net*2_39: *2.39 P5.7 | length 1804.6
  Top Layer w6: P5.7 1144.57,3701.57 v1(1608,4165) ; v1(1965,4135) 1965,4262.02 1921,4306.02 1921,4374.08 1942.4,4395.48 2114,4395.48 *2.39
  Bottom Layer w6: v1(1608,4165) 1655.05,4165 1785.05,4295 1933.99,4295 1975,4253.99 1975,4196.01 1965,4186.01 v1(1965,4135)
Net*2_41: *2.41 P5.6 | length 1608.6
  Top Layer w6: P5.6 1194.43,3652.36 1679,4136.93 1679,4192.92 1621,4250.92 1621,4329.08 1670,4378.08 v1(1670,4455) ; *2.41 v1(2015,4502)
  Bottom Layer w6: v1(1670,4455) 1968,4455 v1(2015,4502)
Net*2_42: *2.42 P5.5 | length 2201.4
  Top Layer w6: P5.5 1253.1,3603.15 1570,3920.05 1570,3985 1635,4050 1635,4075.96 1691,4131.96 1691,4197.89 1635,4253.89 1635,4275 1641,4281 1669.08,4281 1689,4300.92 1689,4329 1714,4354 1714,4433.95 1716,4435.95 1716,4529 1645,4600 v1(1645,4615) ; *2.42 1965,4500.08 2000.92,4536 2099,4536 v1(2100,4535)
  Bottom Layer w6: v1(1645,4615) 1881.92,4615 1895.92,4629 1924.08,4629 1944,4609.08 1944,4605 1970,4605 2040,4535 v1(2100,4535)
Net*2_43: *2.43 P5.4 | length 2744.9
  Top Layer w6: P5.4 1413.94,3553.94 1590,3730 v1(1590,3800) ; v1(1120,4035) 1165.21,4035 1266.32,4136.11 1266.32,4544.4 1297.92,4576 1297.92,4607.92 v1(1300,4610) ; *2.43 1915,4500 1960,4545 v1(1960,4547.5)
  Bottom Layer w6: v1(1120,4035) 1186.92,4035 1421.92,3800 v1(1590,3800) ; v1(1300,4610) 1376,4534 1684.05,4534 1704.05,4554 1953.5,4554 v1(1960,4547.5)
Net*2_44: *2.44 P5.3 | length 2530.2
  Top Layer w6: P5.3 1534.72,3504.72 1685,3655 v1(1685,3765) ; v1(1245,4025) 1245,4097.82 1305,4157.82 v1(1305,4535) ; *2.44 1860,4445 1860,4515 v1(1865,4520)
  Bottom Layer w6: v1(1245,4025) 1425,4025 v1(1685,3765) ; v1(1305,4535) 1320,4520 v1(1865,4520)
Net*2_46: *2.46 P5.2 | length 2073
  Top Layer w6: P5.2 1214,3455.51 1319.51,3350 v1(1445,3350) ; *2.46 1814,4341.58 1814,4330.95 1872.95,4272 1882.95,4272 1895,4259.95 1895,4235 1870,4210 v1(1870,4155)
  Bottom Layer w6: v1(1445,3350) 1727,3632 1727,3863 1489,4101 1495,4095 1725,4095 1785,4155 v1(1870,4155)
Net*2_47: *2.47 P5.10 | length 1647
  Top Layer w6: P5.10 1237.21,3849.21 1599,4211 1599,4634.05 1625.95,4661 1690.05,4661 1740,4611.05 1740,4426.01 1738.28,4424.29 1738.28,4320.13 1739,4319.41 1739,4291.58 *2.47
Net*2_49: *2.49 P4.4 | length 2640.7
  Top Layer w6: v1(1730,3970) 1730,3986.27 1738,3994.27 1738,4190.58 *2.49 ; v1(2993,4049) 2993,4190 3002,4199 3063,4199 3163.82,4299.82 P4.4
  Bottom Layer w6: v1(1730,3970) 1730,3876.97 1792.97,3814 2403,3814 2607.48,4018.48 2962.48,4018.48 v1(2993,4049)
Net*2_52: *2.52 P6.7 | length 1757.6
  Top Layer w6: *2.52 2013.03,3979.77 1982.09,3979.77 1919,4042.86 1919,4252.92 1870.92,4301 1860.92,4301 1826,4335.92 1826,4360.23 1817.42,4368.82 1775.66,4368.82 1764,4380.48 1764,4637.5 1779.5,4653 1792.5,4653 1826,4686.5 1826,4715 2034,4923 2481,4923 2495.28,4908.72 P6.7
Net*2_53: *2.53 P6.8 | length 1832.7
  Top Layer w6: *2.53 2063.03,4006 2040.92,4006 2039.75,4007.17 2039.75,4020.5 2034.48,4025.77 1961.14,4025.77 1931,4055.92 1931,4185.95 1951,4205.95 1951,4259.05 1909,4301.05 1909,4359.08 1870.55,4397.54 1793.56,4397.54 1788.28,4402.81 1788.28,4531.37 1885.92,4629 2046.92,4629 2106.92,4569 2475.97,4569 2544.49,4637.52 P6.8
Net*2_54: *2.54 P6.9 | length 2046.6
  Top Layer w6: v1(2075,4070) 2075,4059.37 2133.75,4000.62 2133.75,3998.12 *2.54 ; v1(2593.7,4758.47) P6.9
  Bottom Layer w6: v1(2075,4070) 2083.5,4070 2193.87,3959.63 2231.98,3959.63 2286,4013.66 2286,4124.08 2340.42,4178.5 2419.5,4178.5 2468,4130 2661.91,4130 2763.41,4231.5 2950,4231.5 2963,4244.5 2963,4425.08 2928.65,4459.43 2892.74,4459.43 v1(2593.7,4758.47)
Net*2_55: *2.55 P6.10 | length 1642.2
  Top Layer w6: *2.55 2163.03,4019.77 2169.77,4019.77 2183.91,4005.63 v1(2212.92,4005.63) ; v1(2642.91,4600.09) P6.10
  Bottom Layer w6: v1(2212.92,4005.63) 2212.92,4084.95 2379.98,4252 2900,4252 2923,4275 2923,4320 v1(2642.91,4600.09)
NetC18_1: C18.1 U3.2 | length 417.2
  Top Layer w6: C18.1@1655,1615 1685.12,1645.12 1830,1645.12 1839.02,1654.13 U3.2
NetC19_1: C19.1 U3.4 | length 582.2
  Top Layer w6: C19.1 1528.65,1793.91 1740.62,1793.91 1801.7,1732.83 2048.12,1732.83 U3.4
NetC20_1: C20.1 C21.1 U4.5 | length 789.8
  Top Layer w6: C20.1 3726,3417.56 3732.14,3411.42 3777,3411.42 ; C21.1 3777,3411.42 ; U4.5 3857,2890 3857,2909 3826,2940 3826,3146 3730,3242 3730,3364.42 3777,3411.42
NetC22_1: C22.1 C23.1 U4.8 | length 1751.1
  Top Layer w6: C22.1 3530,3418 3576,3464 4191.58,3464 4332,3323.58 C23.1 4370,3047 4329,3006 4016,3006 3974,3048 3855.39,3048 U4.8
NetC24_1: C24.1 D1.1 U3.6 | length 431.8
  Top Layer w6: U3.6 2017.54,1795.87 1996.75,1816.66 1996.75,1893.18 2076.1,1972.54 D1.1 2076.1,2073 2095,2091.9 C24.1
NetC25_1: C25.1 C26.1 U4.10 | length 751
  Top Layer w6: v1(3720,3180) 3720,3135.39 3755.39,3100 U4.10 ; C25.1 4101,3359.88 v1(4119,3328.58) C26.1
  Bottom Layer w6: v1(3720,3180) 3970.42,3180 v1(4119,3328.58)
NetC29_1: C29.1 U5.14 | length 596.6
  Top Layer w6: C29.1 3362.5,2242.56 3379,2226.06 3379,1862.5 3396.5,1845 U5.14
NetC30_1: C30.1 U5.1 | length 1040.7
  Top Layer w6: U5.1 3197,1945 3198,1944 3198,1770 3197,1769 3117,1769 3114,1766 3114,1621 3115,1620 3275,1620 3292.44,1637.44 C30.1
NetC31_1: C31.1 D2.1 U5.9 | length 1546.2
  Top Layer w6: D2.1 2962.8,2056 2887.17,2131.63 C31.1 2845,2209 2845,2029 2764,1948 2764,1859 3064,1559 3230,1559 3266,1595 U5.9
NetD1_2: D1.2 L3.1 U3.9 | length 520.6
  Top Layer w6: D1.2 2163.9,2021 2189.02,2021 2334.02,1876 2334.02,1794.85 ; U3.9 2333,1795.87 2334.02,1794.85 ; L3.1 2334.02,1794.85
NetD2_2: D2.2 L4.1 U5.8 | length 584.2
  Top Layer w6: D2.2 2875,1967 2880,1962 L4.1 2880,1815 3100,1595 U5.8
NetL1_1: L1.1 P1.3 | length 116.1
  Top Layer w6: P1.3 1278,2129.21 1283.79,2135 L1.1
PO1: P7.7
PO2: P7.8
PO3: P7.9
PO4: P7.10
REST21: P2.10 U2.40 | length 564.5
  Top Layer w6: U2.40 3559.21,4634 3572,4646.79 4023.1,4646.79 P2.10
REST51: *1.114 P3.10 | length 896.5
  Top Layer w6: *1.114 2511.34,3401 v1(2542.34,3432)
  Bottom Layer w6: v1(2542.34,3432) 3088,3432 P3.10
SAMCLK: *1.33 U2.13 | length 2658.9
  Top Layer w6: *1.33 2290.87,2762.37 2300,2771.5 2300,2860.85 2403.15,2964 2664.08,2964 2686.27,2941.81 2686.27,2814.78 2737.3,2763.76 2784.98,2763.76 2787.62,2761.12 2908.62,2761.12 2972.3,2824.8 2972.3,2997.25 3078,3102.95 3078,3780 3401.73,4103.73 U2.13
SAMCS: *1.36 U2.16 | length 3117.9
  Top Layer w6: *1.36 2338.11,2506.89 2386,2459 v1(2386,2446.5) ; v1(3308.18,2428.68) 3407,2527.5 3407,3992.21 3460.79,4046 U2.16
  Bottom Layer w6: v1(2386,2446.5) 2398.5,2459 2485.68,2459 2516,2428.68 v1(3308.18,2428.68)
SAMMISO: *1.35 U2.15 | length 3531.3
  Top Layer w6: v1(2309.86,2487) 2322.36,2499.5 *1.35 ; v1(3437.5,2490) 3437.5,3838.5 3634,4035 3634,4296 3633,4297 3442.1,4297 3441.1,4296 U2.15
  Bottom Layer w6: v1(2309.86,2487) 2441.68,2487 2455.28,2473.4 2512.5,2473.4 2526.77,2459.13 2526.77,2441.91 2528,2440.68 2625,2440.68 2674.32,2490 v1(3437.5,2490)
SAMMOSI: *1.34 U2.14 | length 2996.5
  Top Layer w6: *1.34 2306.61,2667 2305.61,2666 2279,2666 2278,2667 2278,2773.31 2286,2781.31 2286,2863.82 2398.18,2976 2669.05,2976 2699,2946.05 2699,2819.03 2742.27,2775.76 2798.82,2775.76 2801.45,2773.12 2901,2773.12 2960.3,2832.42 2960.3,3002.22 3060,3101.92 3060,4143 3214,4297 3417,4297 3421.42,4292.58 U2.14
SD0: *1.2 SD1.1 | length 911.5
  Top Layer w6: SD1.1 1737.54,2872.54 2122.72,3257.72 *1.2
SD1: *1.3 SD1.2 | length 922.9
  Top Layer w6: SD1.2 1743.26,2829.23 2156,3241.97 *1.3
SD2: *1.27 SD1.3 | length 808.1
  Top Layer w6: SD1.3 1990.01,2785.93 2025,2820.92 2025,2838.99 2066.01,2880 2123.99,2880 2139.98,2864.02 *1.27
SD3: *1.28 SD1.7 | length 876.4
  Top Layer w6: SD1.7 1833.75,2612.7 2037,2815.95 2037,2834.02 2070.98,2868 2119.02,2868 2138.76,2848.27 *1.28
SD4: *1.29 SD1.8 | length 890.1
  Top Layer w6: SD1.8 1809.38,2571.36 2049,2810.98 2049,2829.05 2075.95,2856 2114.05,2856 2137.53,2832.52 *1.29
SDCLK: *1.30 SD1.5 | length 1285.1
  Top Layer w6: SD1.5 1425,2699.31 1400,2674.31 1400,2503 1463,2440 1694.99,2440 2061,2806.01 2061,2824.08 2080.92,2844 2109.08,2844 2136.31,2816.77 *1.30
SDCLK21: U2.45
SWCLK21: P2.4
SWCLK51: *1.119 P3.4 | length 1326.4
  Top Layer w6: v1(2345,3270) 2345,3243.42 2387.92,3200.5 2416.08,3200.5 2436,3220.42 2436,3296.6 *1.119
  Bottom Layer w6: v1(2345,3270) 2355,3280 2940,3280 P3.4
SWDIO21: P2.2 U2.46 | length 1454.8